# Altium PCB FourInOneSensorBoardCO2-V1.0.PcbDoc
Units mm, origin at the board's own origin, x right, y up, seen from the top; angles counter-clockwise.
Board outline 96.01 x 96.01 mm, 2 copper layers (Top Layer, Bottom Layer); 38 components, 21 nets, 156 pads, 23 vias.
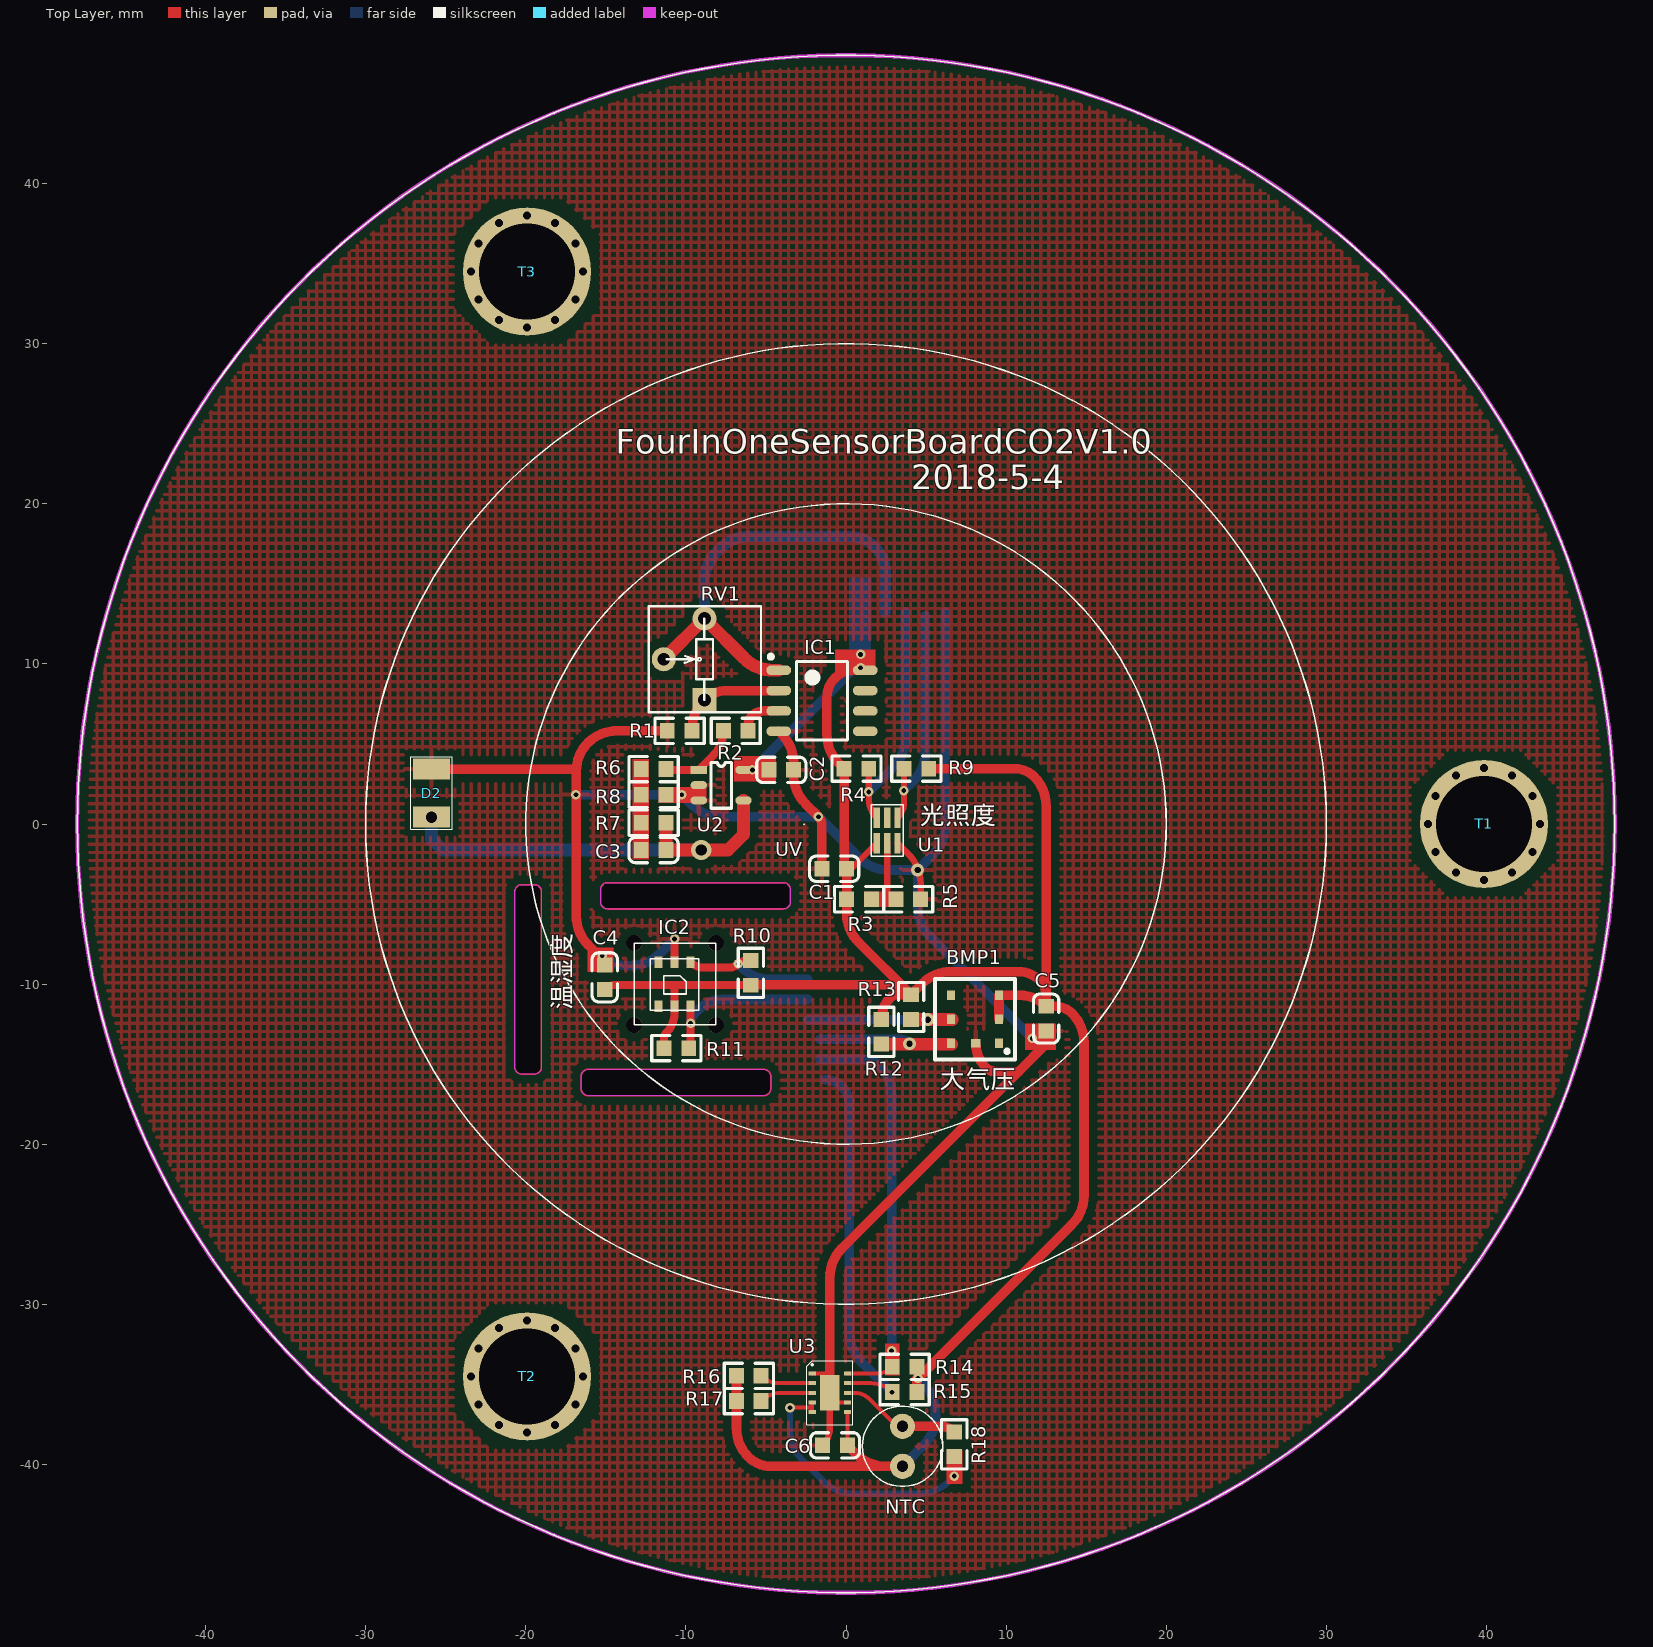
[diagram p0: Top Layer view]
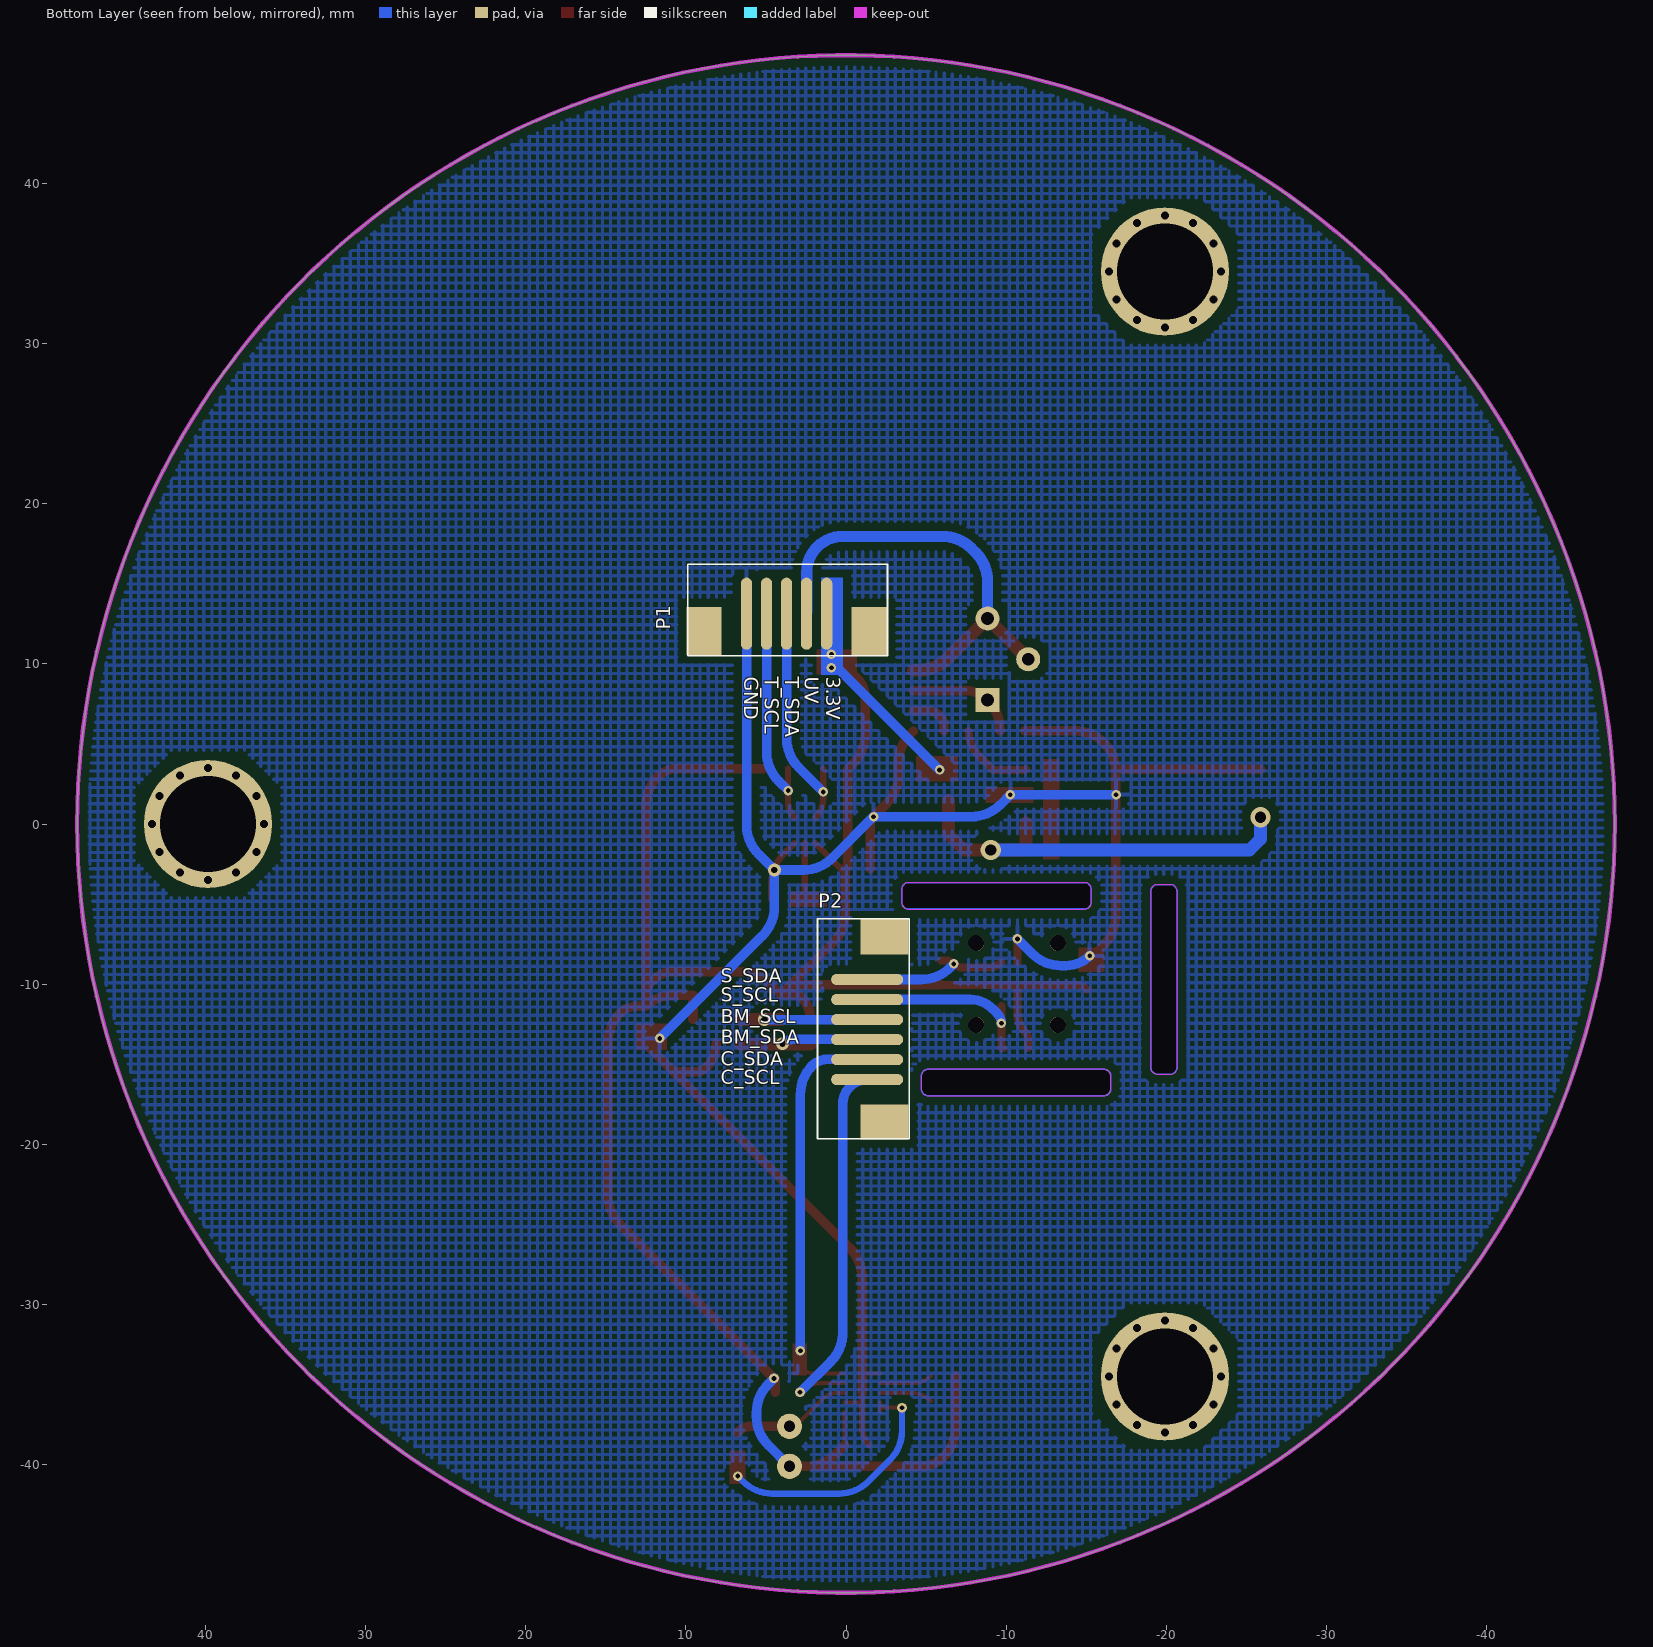
[diagram p1: Bottom Layer view, seen from below]
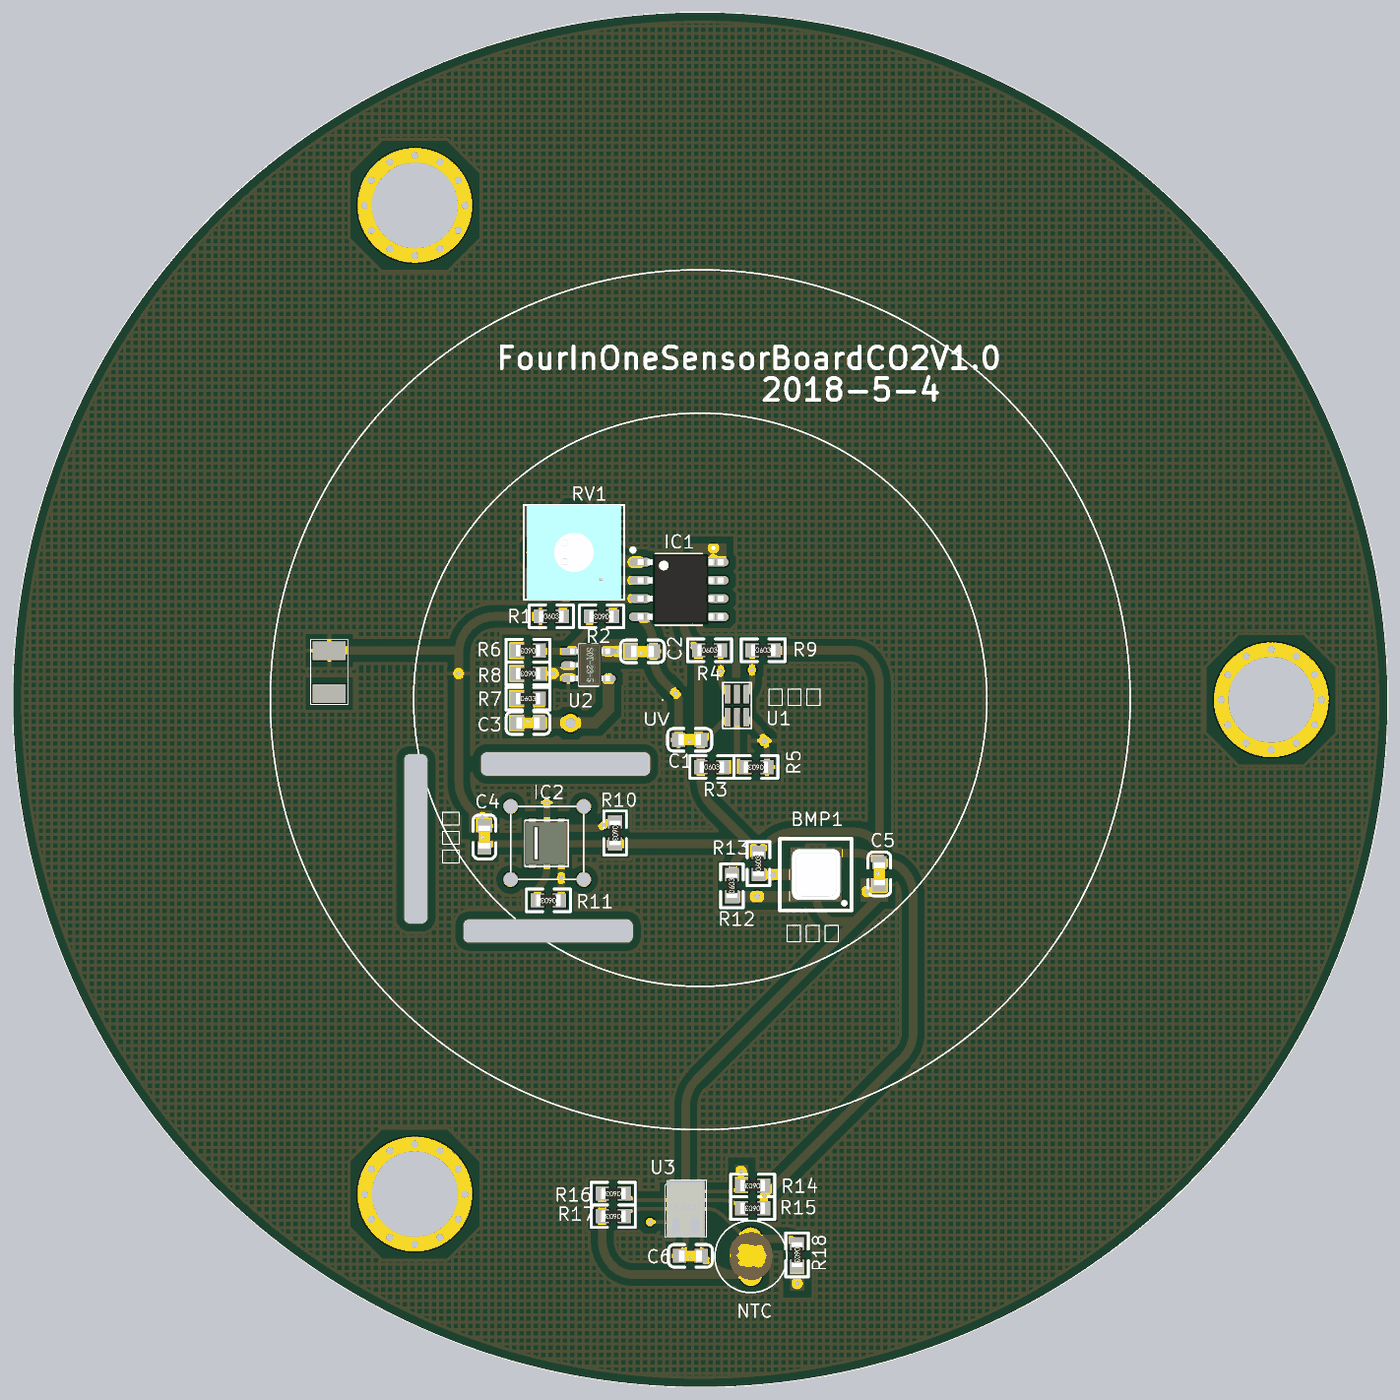
[diagram p2: 3D render of the assembled board from above, using the file's embedded part models]

## Layer stack, top to bottom
Top Layer: signal copper 0.0356
Dielectric: dielectric 0.32, FR-4, Dk 4.8
Bottom Layer: signal copper 0.0356

## Board outline
0,-48.006 cw(c0,0) -48.006,0 cw(c0,0) 0,48.006 cw(c0,0) 48.006,0 cw(c0,0)
cut-out: -14.884,-5.309 cw(c-14.884,-4.877) -15.316,-4.877 -15.316,-4.089 cw(c-14.884,-4.089) -14.884,-3.658 -3.912,-3.658 cw(c-3.912,-4.089) -3.48,-4.089 -3.48,-4.877 cw(c-3.912,-4.877) -3.912,-5.309
cut-out: -16.104,-16.967 cw(c-16.104,-16.535) -16.535,-16.535 -16.535,-15.748 cw(c-16.104,-15.748) -16.104,-15.316 -5.131,-15.316 cw(c-5.131,-15.748) -4.699,-15.748 -4.699,-16.535 cw(c-5.131,-16.535) -5.131,-16.967
cut-out: -19.025,-15.189 cw(c-19.456,-15.189) -19.456,-15.621 -20.244,-15.621 cw(c-20.244,-15.189) -20.676,-15.189 -20.676,-4.216 cw(c-20.244,-4.216) -20.244,-3.785 -19.456,-3.785 cw(c-19.456,-4.216) -19.025,-4.216

## Design rules (kind name [scope] priority, off if disabled: settings)
Clearance [All] p1: gap=0.5
HoleSize [All] p1: absolutevalues=TRUE maxlimit=5 minlimit=0 maxpercent=80.000 minpercent=20.000
PolygonConnect [All] p1: connectstyle=Relief reliefconductorwidth=0.254 reliefentries=4 polygonreliefangle="90 Angle"
RoutingVias [All] p1: holewidth=0.6 width=0.3 viastyle="Through Hole" minholewidth=0.6 minwidth=0 maxholewidth=10 maxwidth=10
SilkToSilkClearance [All] p1: silktosilkclearance=0
SilkscreenOverComponentPads [IsPad] p1: minsilkscreentomaskgap=0
SolderMaskExpansion [All] p1: expansion=0.102
Width [All] p1: maxlimit=5 minlimit=0.2 preferedwidth=0.6
25 further rules are at their usual default settings.

## Components (designator, comment, footprint, x,y, rotation, side; value= is the part's Value field where it differs from the comment)
BMP1 "BMP180" BMP180 9.553,-10.692 r270 top
C1 "0.1uF/50V" C-0603 -0.737,-2.794 r180 top
C2 "0.1uF/50V" C-0603 -4.039,3.378 r180 top
C3 "0.1uF/50V" C-0603 -12.014,-1.626 r0 top
C4 "0.1uF/50V" C-0603 -15.062,-9.576 r90 top
C5 "0.1uF/50V" C-0603 12.497,-12.149 r90 top
C6 "0.1uF/50V" C-0603 -0.686,-38.8 r180 top
D2 "GUVA-S12SD" GUVA-S12SD -25.883,3.429 r270 top
IC1 "LM358DT" SOIC8_39MM -1.499,7.696 r0 top
IC2 "SHT20" SHT20 -9.703,-8.712 r270 top
NTC "10K" NTC 3.531,-40.107 r180 top
P1 "Header 5" JXT-5-L 6.208,13.132 r270 bottom
P2 "Header 6" JXT-6-l -1.321,-15.962 r180 bottom
R1 "10K" R-0603 -10.389,5.817 r0 top
R2 "15K" R-0603 -6.883,5.817 r180 top
R3 "0R" R-0603 0.813,-4.699 r0 top
R4 "10K" R-0603 0.652,3.454 r0 top
R5 "0R" R-0603 3.886,-4.699 r180 top
R6 "3.3K" R-0603 -12.014,3.429 r180 top
R7 "1M" R-0603 -12.014,0.076 r0 top
R8 "1K" R-0603 -12.014,1.829 r180 top
R9 "10K" R-0603 4.394,3.454 r0 top
R10 "4.7K" R-0603 -5.944,-9.296 r270 top
R11 "4.7K" R-0603 -10.592,-13.995 r180 top
R12 "4.7K" R-0603 2.21,-12.979 r90 top
R13 "4.7K" R-0603 4.064,-11.43 r90 top
R14 "4.7K" R-0603 3.658,-33.898 r180 top
R15 "4.7K" R-0603 3.658,-35.473 r180 top
R16 "4.7K" R-0603 -6.071,-34.457 r180 top
R17 "4.7K" R-0603 -6.071,-36.032 r180 top
R18 "100K" R-0603 6.756,-38.732 r270 top
RV1 "20K" VR3362P -5.309,6.987 r90 top
T1 "TP" 安装孔-M6 39.84,0 r0 top
T2 "TP" 安装孔-M6 -19.914,-34.493 r0 top
T3 "TP" 安装孔-M6 -19.914,34.493 r0 top
U1 "TSL2561" TSL2561_FN 2.565,-0.406 r90 top
U2 "SGM8521" SOT-23-5 -9.195,3.378 r0 top
U3 "CCS811" CCS811 -2.108,-34.318 r0 top

## Footprints (in the part's own frame and the unit in brackets; to place one, negate y for a bottom-side part, rotate by r counter-clockwise, add the part's x,y. Pads: shape width x height; smd on the part's side, far side on the other; paste and mask are expansions set on the pad)
BMP180 [mm]
  rect 0.61x0.51 smd: 1(3,0) 2(1.5,0) 3(0,0) 4(0,-3) 5(1.5,-3) 6(3,-3)
  rect 0.51x0.61 smd: 7(3,-1.45)
  silkscreen extent -1,-4 4,1, body extent -0.4,-3.27 3.4,0.33, height 0.98
C-0603 [mm]
  rect 0.93x0.98 smd: 1(-0.77,0) 2(0.77,0)
  silkscreen extent -1.53,-0.79 1.54,0.79, body extent -0.8,-0.4 0.8,0.4, height 0.3
CCS811 [mm]
  rect 1.2x2.2 smd: 0(1.1,-1.2)
  rect 0.45x0.25 smd: 1(0,0) 2(0,-0.6) 3(0,-1.2) 4(0,-1.8) 5(0,-2.4) 6(2.2,-2.4) 7(2.2,-1.8) 8(2.2,-1.2) 9(2.2,-0.6) 10(2.2,0)
  silkscreen extent -0.36,-3.19 2.54,0.81, body extent -0.26,-3.2 2.44,0.8, height 1.1
GUVA-S12SD [mm] "UV SENSOR"
  rect 1.3x2.3 smd: 1(0,0) 2(3,0)
  silkscreen extent -0.76,-1.3 3.76,1.3
JXT-5-L [mm] "1.27Á¢Ê½Ì"
  rect 3x2.2 smd: 0(1.092,-2.652) 0(1.092,7.655)
  oval 4.5x0.7 smd: 1(0,5) 2(0,3.75) 3(0,2.5) 4(0,1.25) 5(0,0)
  silkscreen extent -3.1,-3.68 2.62,8.8, body extent -2.01,-3.26 2.69,8.28, height 3.35
JXT-6-l [mm] "1.2"
  rect 3x2.2 smd: 0(1.092,-2.652) 0(1.092,8.925)
  oval 4.5x0.7 smd: 1(0,6.25) 2(0,5) 3(0,3.75) 4(0,2.5) 5(0,1.25) 6(0,0)
  silkscreen extent -3.1,-3.68 2.62,10.05, body extent -1.84,-3.23 2.36,9.42, height 4.7
NTC [mil]
  round 62 hole 28: 1(0,0) 2(0,-98.43)
  silkscreen extent -99,-148 99,49, body extent -59,-118 59,16, height 354
R-0603 [mm]
  rect 0.93x0.98 smd: 1(-0.77,0) 2(0.77,0)
  silkscreen extent -1.53,-0.79 1.54,0.79, body extent -0.85,-0.4 0.85,0.4, height 0.56
SHT20 [mm]
  round 1 hole 1: 0(-1.27,1.575) 0(-1.27,-3.525) 0(3.83,1.575) 0(3.83,-3.525)
  rect 0.7x0.5 smd: 1(-0.075,0) 2(-0.075,-1) 3(-0.075,-2) 4(2.665,-2) 5(2.665,-1) 6(2.665,0)
  silkscreen extent -1.27,-3.53 3.83,1.57, body extent -0.2,-2.54 2.8,0.46, height 1
SOIC8_39MM [mm]
  oval 1.55x0.6 smd: 1(-2.7,1.905) 2(-2.7,0.635) 3(-2.7,-0.635) 4(-2.7,-1.905) 5(2.7,-1.905) 6(2.7,-0.635) 7(2.7,0.635) 8(2.7,1.905)
  silkscreen extent -3.32,-2.45 1.6,2.87, body extent -2.87,-2.45 3.13,2.45, height 1.75
SOT-23-5 [mil]
  rect 40x20 smd: 1(0,0)
  oval 40x20 smd: 2(0,-37.4) 3(0,-74.8) 4(110,-74.8) 5(110,0)
  silkscreen extent 30,-94 81,18, body extent 4,-94 114,20, height 47
TSL2561_FN [mil] "TSL256"
  rect 51.18x15.75 smd paste+0: 1(-31.5,25.59) 2(-31.5,0) 3(-31.5,-25.59) 4(31.5,-25.59) 5(31.5,0) 6(31.5,25.59)
  silkscreen extent -63,-39 63,39
VR3362P [mm]
  rect 1.5x1.5 hole 0.8: 1(0.76,3.53)
  round 1.5 hole 0.8: 2(3.3,6.07) 3(5.84,3.53)
  silkscreen extent 0,0 6.6,7, body extent 0,0.2 6.6,6.8, height 4.4
安装孔-M6 [mm]
  round 1 hole 0.5: 0(-3.5,0) 0(-3.031,-1.75) 0(-3.031,1.75) 0(-1.75,-3.031) 0(-1.75,3.031) 0(0,-3.5) 0(0,3.5) 0(1.75,-3.031) 0(1.75,3.031) 0(3.031,-1.75) 0(3.031,1.75) 0(3.5,0)
  round 8 hole 6: 0(0,0)

## Part data
BMP1: "气压传"
C1 C2 C3 C4 C5: library part Cap, "贴片"
C6: library part CAP, "贴片"
D2: "UV"
IC1: "通用"
IC2: "ÎÂÊª¶"
NTC: library part RES-NTC/PTC, "热敏"
P2: "单排插针"
R1 R3 R5 R6 R10 R11 R14 R15 R16 R17 R18: library part R, "贴片"
R2 R4 R8 R9: library part Res2, "贴片"
R7 R12 R13: library part RES2, "贴片"
RV1: library part RV_1, "滑动"
U1: "光照度"
U2: "低功"
U3: "CO2"

## Via types
v1: diameter 0.6, hole 0.3, Top Layer to Bottom Layer, 18 vias
v2: diameter 0.8, hole 0.4, Top Layer to Bottom Layer, 3 vias
v3: diameter 1.27, hole 0.711, Top Layer to Bottom Layer, 2 vias

## Nets (pads, with @x,y where several pads share a name; then routed paths per layer and width w, separated by ;. In a path a pad name is that pad's centre, name@x,y a point inside that pad or via, vN(x,y) a via of type N, cw(c..) or ccw(c..) an arc to the next point about the centre after c; other vN are vias at no path point)
3.3V: BMP1.2 BMP1.3 C1.1 C2.2 C4.1 C5.2 C6.1 IC1.8 IC2.5 NTC.1 P1.1 R3.1 R4.1 R9.2 R10.2 R11.2 R12.2 R13.2 R14.1 R15.1 R16.2 R17.2 U1.1 U2.5 U3.6 | length 154.3
  Top Layer w0.25: C6.1@0.092,-38.793 U3.6
  Top Layer w0.4: C1.1 0.328,-2.794 U1.1
  Top Layer w0.5: C4.1 cw(c-14.326,-11.082) -14.326,-10.041 R10.2@-5.944,-10.041 ; R11.2 -11.362,-13.392 cw(c-10.814,-13.392) -11.201,-13.005 ccw(c-12.405,-11.801) -10.703,-11.801 IC2.5 -10.703,-10.084
  Top Layer w0.6: R16.2 R17.2 -6.841,-37.726 ccw(c-4.301,-37.726) -6.097,-39.522 ccw(c-4.685,-38.11) -4.685,-40.107 2.458,-40.107 ; R10.2@-5.944,-10.041 2.57,-10.041 cw(c2.57,-12.154) R13.2 ; C6.1@0.092,-38.793 0.662,-39.363 ccw(c2.458,-37.567) 2.458,-40.107 ; IC1.8@0.914,9.601 0.479,9.601 ccw(c0.479,7.953) -0.686,9.119 ccw(c0.541,7.892) -1.194,7.892 -1.194,5.583 ccw(c1.346,5.583) -0.45,3.787 R4.1 -0.118,-2.429 ccw(c0.398,-2.429) C1.1 0.043,-2.803 R3.1 0.043,-5.587 ccw(c2.583,-5.587) 0.787,-7.383 R13.2 ; R12.2 cw(c4.153,-12.209) 2.779,-10.836 cw(c3.203,-11.259) 3.203,-10.66 R13.2 ; NTC.1 2.458,-40.107 ; R15.1 v1@4.428,-34.62 ; v1(4.496,-34.62) 14.115,-25.001 ccw(c12.319,-23.205) 14.859,-23.205 14.859,-13.625 ccw(c12.319,-13.625) 14.115,-11.829 ccw(c13.029,-12.915) 13.029,-11.379 C5.2 ; R9.2 10.544,3.454 cw(c10.544,1.745) 11.753,2.954 cw(c9.957,1.158) 12.497,1.158 12.497,-10.699 ; BMP1.2 BMP1.3 10.838,-10.692 cw(c10.838,-13.038) C5.2 ; R13.2 4.76,-9.964 cw(c6.556,-11.76) 6.556,-9.22 10.767,-9.22 cw(c10.767,-11.128) 12.116,-9.779 cw(c11.196,-10.699) 12.497,-10.699 ; C5.2 12.497,-10.699
  Bottom Layer w0.6: v1(-5.842,3.378) 0.591,9.811 ccw(c-0.189,10.592) v1(0.914,10.592) ; NTC.1 4.844,-38.793 ccw(c3.048,-36.997) 5.588,-36.997 5.588,-36.765 ccw(c3.048,-36.765) 4.844,-34.968 v1(4.496,-34.62)
  other v1: 0.914,9.754
BM_SCL: BMP1.5 P2.3 R13.1 | length 10.1
  Top Layer w0.6: R13.1 R13.1@4.069,-12.195
  Top Layer w0.8: R13.1 BMP1.5@6.629,-12.2
  Bottom Layer w0.6: P2.3@-2.388,-12.212 v2(5.105,-12.212)
BM_SDA: BMP1.6 P2.4 R12.1 | length 10.1
  Top Layer w0.8: R12.1 BMP1.6@6.604,-13.749
  Bottom Layer w0.6: P2.4@-1.626,-13.447 3.314,-13.447 cw(c3.314,-14.364) v2(3.962,-13.716)
C_SCK: P2.6 R15.2 U3.9 | length 24.3
  Top Layer w0.25: U3.9 1.547,-34.918 cw(c1.547,-36.814) R15.2
  Bottom Layer w0.6: P2.6 cw(c-1.321,-17.481) -0.247,-16.407 cw(c-1.334,-17.493) 0.203,-17.493 0.203,-31.765 ccw(c2.743,-31.765) 0.947,-33.561 v1(2.87,-35.484)
C_SDA: P2.5 R14.2 U3.10 | length 24.7
  Top Layer w0.25: U3.10 1.875,-34.318 ccw(c1.875,-32.886) R14.2
  Bottom Layer w0.6: P2.5@-1.626,-14.697 1.177,-14.697 cw(c1.177,-16.005) 2.101,-15.08 cw(c0.305,-16.876) 2.845,-16.876 v1(2.845,-32.893)
GND: BMP1.7 C1.2 C2.1 C4.2 C5.1 C6.2 D2.1 IC1.4 IC2.2 P1.5 R1.1 R5.1 R8.1 U1.3 U2.2 U2.3 U3.0 U3.1 U3.7 | length 139.4
  Top Layer w0.25: U3.1 -1.245,-34.318 cw(c-1.245,-34.57) -1.067,-34.392 cw(c-1.208,-34.533) U3.0@-1.008,-34.533 ; U3.0@-1.008,-36.118 U3.7
  Top Layer w0.4: C6.2 ccw(c-2.536,-37.72) -1.008,-37.72 -1.008,-36.118 U3.0 ; U1.3 3.912,-1.903 cw(c2.116,-3.699) 4.656,-3.699 R5.1
  Top Layer w0.5: IC2.2 v1(-10.703,-7.172)
  Top Layer w0.6: D2.1 -16.957,3.429 -16.84,3.312 ; C4.2@-15.215,-8.438 -16.096,-7.556 cw(c-14.3,-5.76) -16.84,-5.76 -16.84,3.312 ; R1.1 -14.315,5.817 ccw(c-14.315,3.277) -16.111,5.073 ccw(c-14.35,3.312) -16.84,3.312 ; IC1.4 -4.013,5.605 cw(c-5.809,3.809) -3.269,3.809 C2.1 -3.269,3.054 ccw(c-0.729,3.054) -2.525,1.257 v1(-1.724,0.457) cw(c-2.25,-0.069) -1.507,-0.069 C1.2 ; U3.0 -1.008,-34.533 -1.008,-28.306 cw(c1.532,-28.306) -0.264,-26.51 10.777,-15.469 ; BMP1.7 ccw(c10.248,-13.692) 8.731,-15.208 ccw(c9.36,-14.58) 9.36,-15.469 10.777,-15.469 ; C5.1 12.497,-13.749 10.777,-15.469
  Bottom Layer w0.6: v1(-16.866,1.829) v1(-10.262,1.829) -9.634,1.201 ccw(c-7.838,2.997) -7.838,0.457 v1(-1.724,0.457) 0.859,-2.126 ccw(c2.655,-0.33) 2.655,-2.87 v2(4.47,-2.87) ; v1(-15.215,-8.23) ccw(c-13.743,-6.758) -13.743,-8.839 -13.422,-8.839 ccw(c-13.422,-6.299) -11.626,-8.095 v1(-10.703,-7.172) ; P1.5@6.203,13.259 6.203,-0.085 cw(c3.663,-0.085) 5.459,-1.882 v2(4.47,-2.87) ; v1(11.633,-13.386) 5.214,-6.967 cw(c7.01,-5.171) 4.47,-5.171 v2(4.47,-2.87)
NetC3_1: C3.1 R6.2 R7.1 R8.2
NetC3_2: C3.2 D2.2 R7.2 U2.4 | length 27.6
  Top Layer w0.8: R7.2 C3.2 v3(-9.042,-1.626) -7.366,-1.626 -6.401,-0.66 U2.4
  Bottom Layer w0.8: v3(-25.883,0.429) -25.883,-0.94 -25.197,-1.626 v3(-9.042,-1.626)
NetIC1_2: IC1.2 R1.2 RV1.1 | length 6.9
  Top Layer w0.6: R1.2 -9.619,5.915 cw(c-7.079,5.915) -8.875,7.712 RV1.1 cw(c-7.429,6.337) -7.429,8.331 IC1.2
NetIC1_3: IC1.3 R2.1 | length 2.8
  Top Layer w0.6: R2.1 -6.113,6.162 cw(c-5.273,6.162) -5.867,6.756 cw(c-5.132,6.021) -5.132,7.061 IC1.3
NetNTC_2: NTC.2 R18.1 U3.8 | length 7.5
  Top Layer w0.25: U3.8 0.512,-35.518 cw(c0.512,-36.876) 1.473,-35.916 2.905,-37.348 ccw(c3.531,-36.722) NTC.2
  Top Layer w0.6: NTC.2 5.898,-37.607 cw(c5.898,-38.821) R18.1
NetR2_2: R2.2 R6.1 U2.1 | length 5
  Top Layer w0.5: R6.1 ccw(c-11.122,3.552) -11.122,3.378 U2.1 -8.288,4.285 ccw(c-9.819,5.817) R2.2
NetR3_2: R3.2 R5.2 U1.2 | length 3.4
  Top Layer w0.4: 2.565,-4.648 U1.2
NetR16_1: R16.1 U3.2 | length 3.3
  Top Layer w0.25: R16.1 ccw(c-4.189,-33.345) -4.189,-34.918 U3.2
NetR17_1: R17.1 U3.3 | length 3.3
  Top Layer w0.25: R17.1 cw(c-4.059,-37.273) -4.059,-35.518 U3.3
NetR18_2: R18.2 U3.4 U3.5 | length 16
  Top Layer w0.25: v1(-3.495,-36.449) -2.108,-36.449 ; U3.5 -2.108,-36.449 ; U3.4 -2.108,-36.449
  Bottom Layer w0.4: v1(-3.495,-36.449) -3.495,-37.897 ccw(c-0.955,-37.897) -2.751,-39.693 -1.379,-41.064 ccw(c0.417,-39.268) 0.417,-41.808 4.612,-41.808 ccw(c4.612,-39.268) 6.408,-41.064 v1(6.756,-40.716)
S_SCK: IC2.6 P2.2 R11.1 | length 10.8
  Top Layer w0.5: R11.1 -9.703,-13.995 v1(-9.703,-12.446) IC2.6
  Bottom Layer w0.6: v1(-9.703,-12.446) cw(c-8.844,-12.446) -9.451,-11.839 -9.144,-11.532 cw(c-7.769,-12.907) -7.769,-10.962 P2.2@-2.388,-10.962
S_SDA: IC2.1 P2.1 R10.1 | length 8.6
  Top Layer w0.5: IC2.1 ccw(c-8.909,-7.844) -8.909,-8.966 -7.283,-8.966 ccw(c-7.283,-8.186) v1(-6.731,-8.738) cw(c-6.221,-9.247) -6.221,-8.526 R10.1
  Bottom Layer w0.6: v1(-6.731,-8.738) -6.501,-8.968 ccw(c-4.705,-7.172) -4.705,-9.712 P2.1@-2.388,-9.712
T_SCL: P1.4 R9.1 U1.4 | length 14.8
  Top Layer w0.4: U1.4 ccw(c2.228,1.381) 3.624,1.381 R9.1
  Bottom Layer w0.6: v1(3.607,2.083) 4.209,2.685 ccw(c2.413,4.481) 4.953,4.481 ; 4.953,4.227 P1.4@4.953,13.005
T_SDA: P1.3 R4.2 U1.6 | length 15.3
  Top Layer w0.4: R4.2 v1(1.422,2.007) 1.422,1.584 ccw(c3.106,1.584) U1.6
  Bottom Layer w0.6: v1(1.422,2.007) 2.959,3.543 ccw(c1.163,5.339) 3.703,5.339 P1.3@3.703,13.259
UVAOUT: IC1.1 P1.2 RV1.2 RV1.3 | length 28.4
  Top Layer w0.8: RV1.2 RV1.3 -6.357,10.345 ccw(c-4.561,12.141) -4.561,9.601 IC1.1
  Bottom Layer w0.7: RV1.3 -8.839,15.153 cw(c-6.299,15.153) -8.095,16.949 -7.831,17.214 cw(c-6.034,15.418) -6.034,17.958 0.209,17.958 cw(c0.209,15.703) 1.803,17.297 cw(c0.235,15.729) 2.453,15.729 P1.2@2.453,13.259
pads on no net: BMP1.1 BMP1.4 IC1.5 IC1.6 IC1.7 IC2.0 IC2.3 IC2.4 P1.0 P2.0 T1.0 T2.0 T3.0 U1.5

## Polygon pours and split planes (outlines as drawn)
GND on Top Layer "Top Layer-No Net" (hatched 90Degree grid 0.508 track 0.203, remove dead copper, pour order 6): -46.228,49.276 -45.568,48.616 52.705,48.616 52.705,-55.601 52.883,-55.778 51.054,-53.95 -55.448,-53.95 -55.448,39.573 -46.076,48.946
GND on Bottom Layer "Top Layer-No Net" (hatched 90Degree grid 0.508 track 0.203, remove dead copper, pour order 10): -53.645,52.273 -50.571,49.2 54.356,49.2 54.356,-45.466 39.599,-60.223 37.795,-62.027 -57.785,-62.027 -57.785,47.219 -53.645,51.359

## Keep-outs
Keep-Out Layer:
  circle w0.254: c0,0 r48.006

## Other copper
Top Layer:
  rectangle net GND: -16.129,-9.246 -14.503,-7.696
  rectangle net GND: -11.709,1.321 -8.712,2.311
  rectangle net GND: 11.176,-14.097 13.106,-12.446
  rectangle net NetC3_1: -13.335,-2.21 -12.294,4.064
  rectangle net 3.3V: -6.985,2.642 -4.369,4.242
  rectangle net NetR3_2: 1.194,-5.182 3.505,-4.216
  rectangle net 3.3V: -0.686,9.322 1.829,10.897
  rectangle net NetR18_2: 6.274,-41.224 7.264,-39.116
  rectangle net C_SDA: 2.438,-34.442 3.353,-32.436
Bottom Layer:
  rectangle net 3.3V: 0.178,9.296 1.549,15.392
Multi-Layer:
  lines w0.1: -20.676,-15.189 ccw(c-20.244,-15.189) -20.244,-15.621 -19.456,-15.621 ccw(c-19.456,-15.189) -19.025,-15.189 -19.025,-4.216 ccw(c-19.456,-4.216) -19.456,-3.785 -20.244,-3.785 ccw(c-20.244,-4.216) -20.676,-4.216 -20.676,-15.189 ; -16.535,-16.535 ccw(c-16.104,-16.535) -16.104,-16.967 -5.131,-16.967 ccw(c-5.131,-16.535) -4.699,-16.535 -4.699,-15.748 ccw(c-5.131,-15.748) -5.131,-15.316 -16.104,-15.316 ccw(c-16.104,-15.748) -16.535,-15.748 -16.535,-16.535 ; -15.316,-4.877 ccw(c-14.884,-4.877) -14.884,-5.309 -3.912,-5.309 ccw(c-3.912,-4.877) -3.48,-4.877 -3.48,-4.089 ccw(c-3.912,-4.089) -3.912,-3.658 -14.884,-3.658 ccw(c-14.884,-4.089) -15.316,-4.089 -15.316,-4.877

## Silkscreen, mask and mechanical layers (free items; w line width, h text height)
Top Overlay:
  circle w0.1: c0,0 r20
  circle w0.1: c0,0 r30
  circle w0.1: c0,0 r47.995
  lines w0.1: -2.642,-0.025 -2.616,-0.025
  text "FourInOneSensorBoardCO2V1.0" at -14.376,23.114 h1.52
  text "2018-5-4" at 4.089,20.904 h1.52
  text "光照度" at 4.597,-0.432 h2
  text "UV" at -4.42,-2.311 h1.5
  text "温湿度" at -16.789,-11.608 h2 r90
  text "大气压" at 5.867,-16.916 h2
Bottom Overlay:
  text "3.3V" at 1.549,9.195 h1.5 r90
  text "UV" at 2.896,9.195 h1.5 r90
  text "T_SDA" at 4.115,9.195 h1.5 r90
  text "T_SCL" at 5.385,9.195 h1.5 r90
  text "GND" at 6.68,9.195 h1.5 r90
  text "S_SDA" at 7.823,-10.236 h1.5
  text "S_SCL" at 7.823,-11.405 h1.5
  text "BM_SCL" at 7.823,-12.751 h1.5
  text "BM_SDA" at 7.823,-14.046 h1.5
  text "C_SDA" at 7.823,-15.392 h1.5
  text "C_SCL" at 7.823,-16.561 h1.5

## Text inside footprints (layer, text, board x,y; h text height)
IC1: Mechanical 15 "1" at -1.049,7.532 h0.75 r90